# Altium PCB charger.PcbDoc
Units mil, origin at the board's own origin, x right, y up, seen from the top; angles counter-clockwise.
Board outline 1720 x 2280 mil, 2 copper layers (Top Layer, Bottom Layer); 11 components, 7 nets, 27 pads, 5 vias.
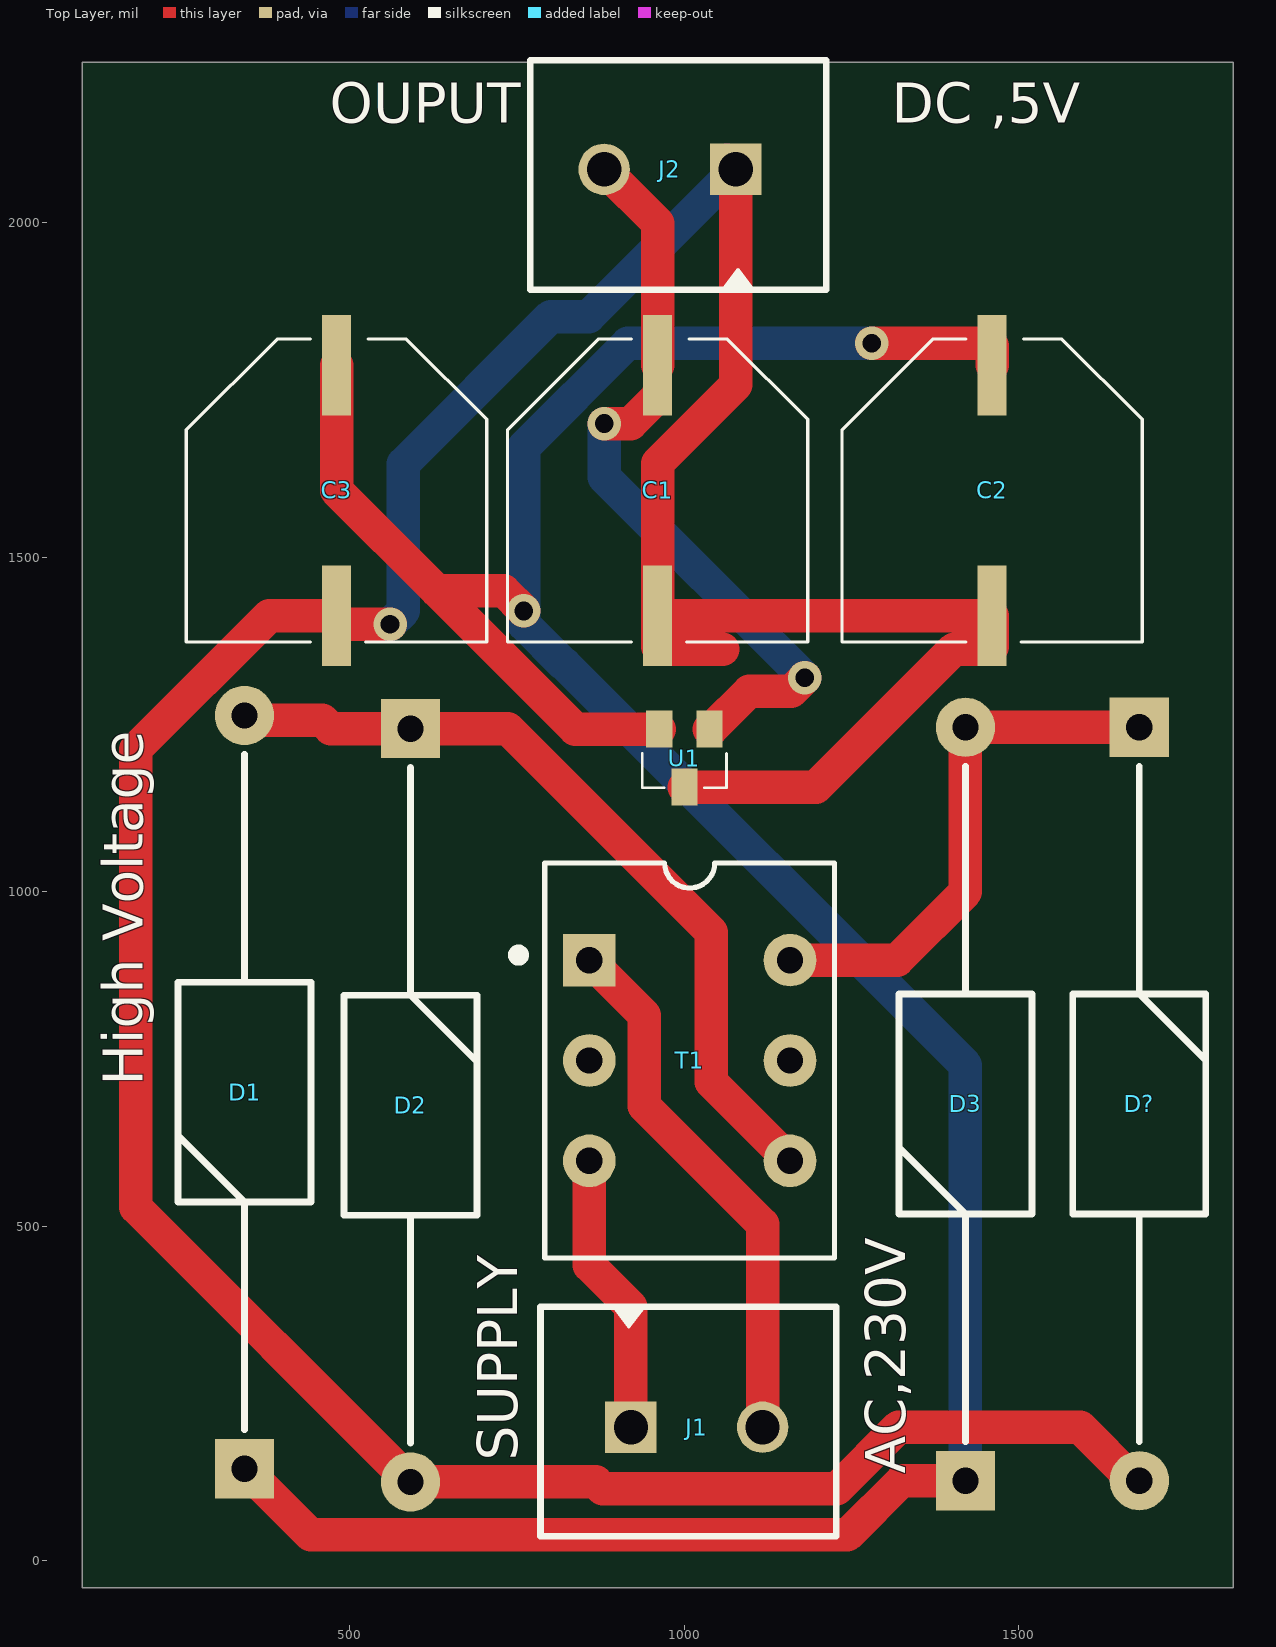
[diagram p0: Top Layer view]
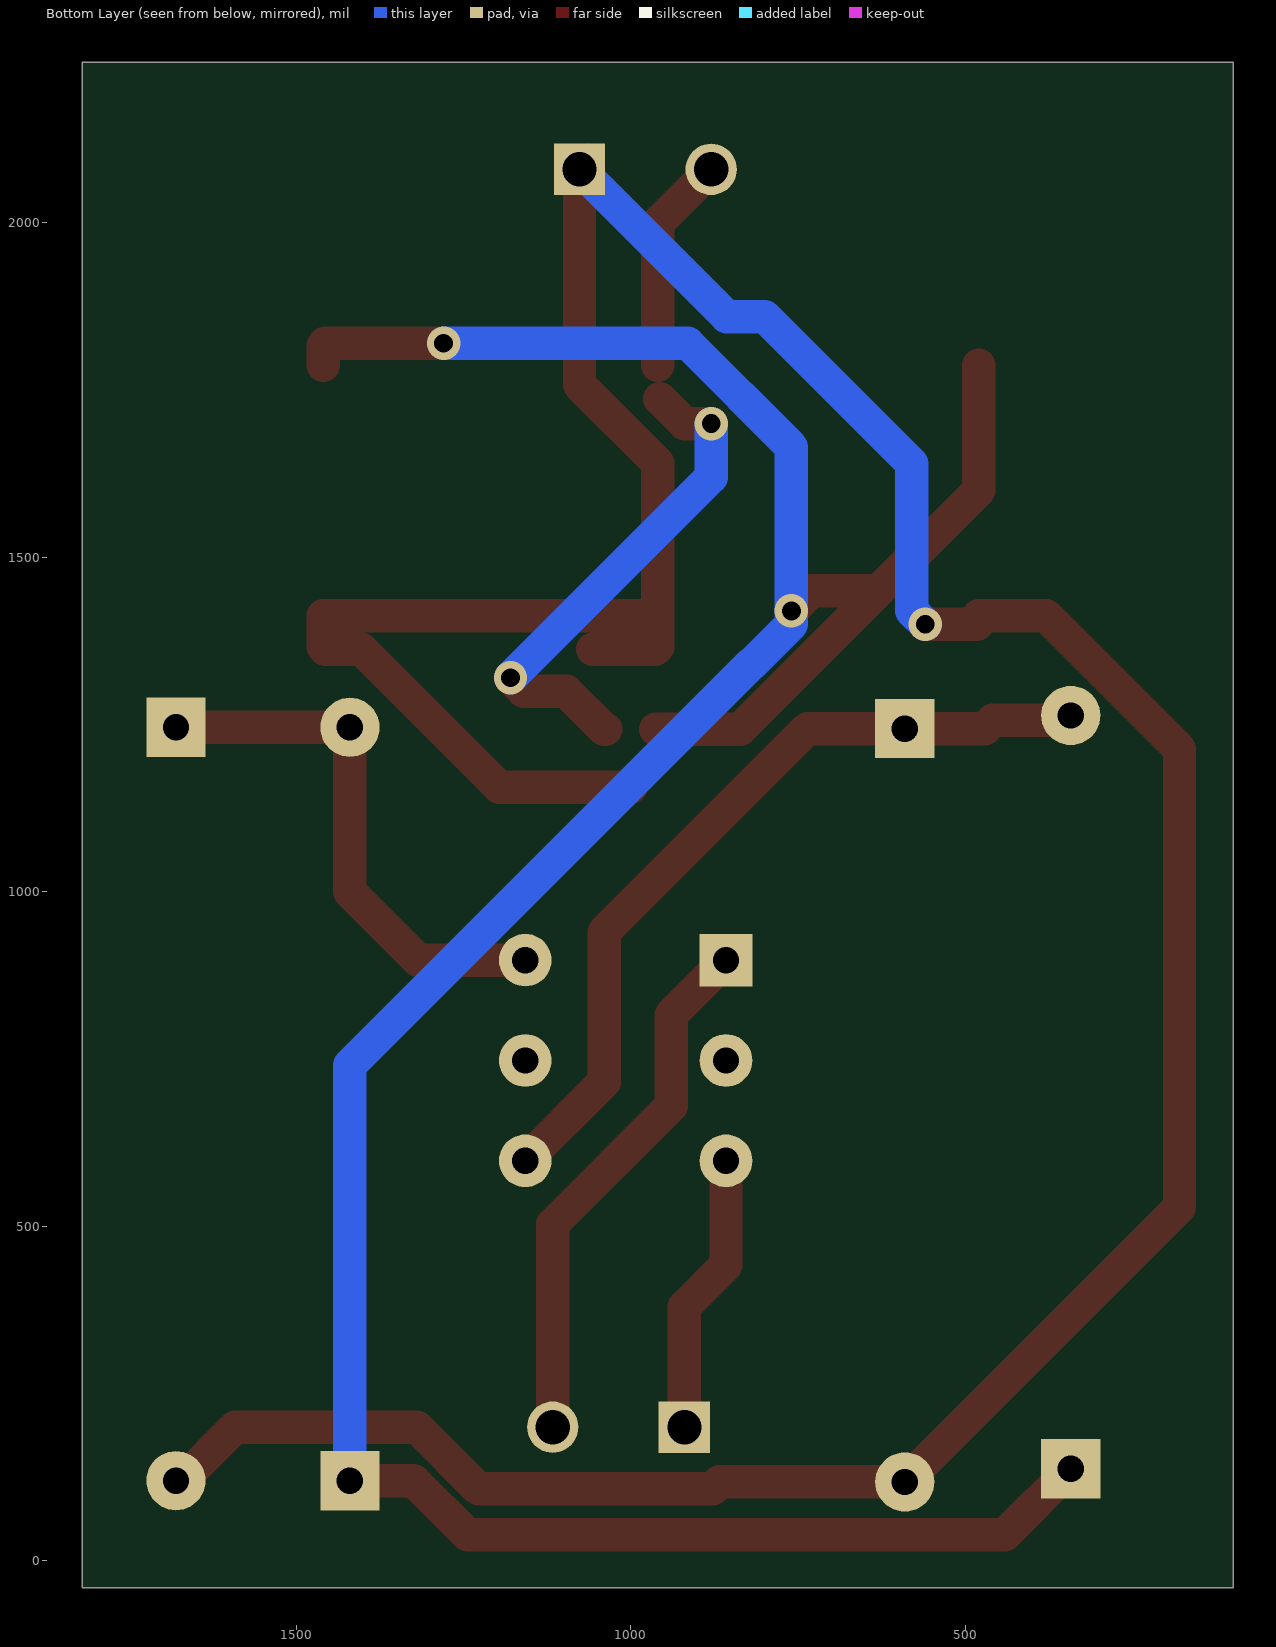
[diagram p1: Bottom Layer view, seen from below]
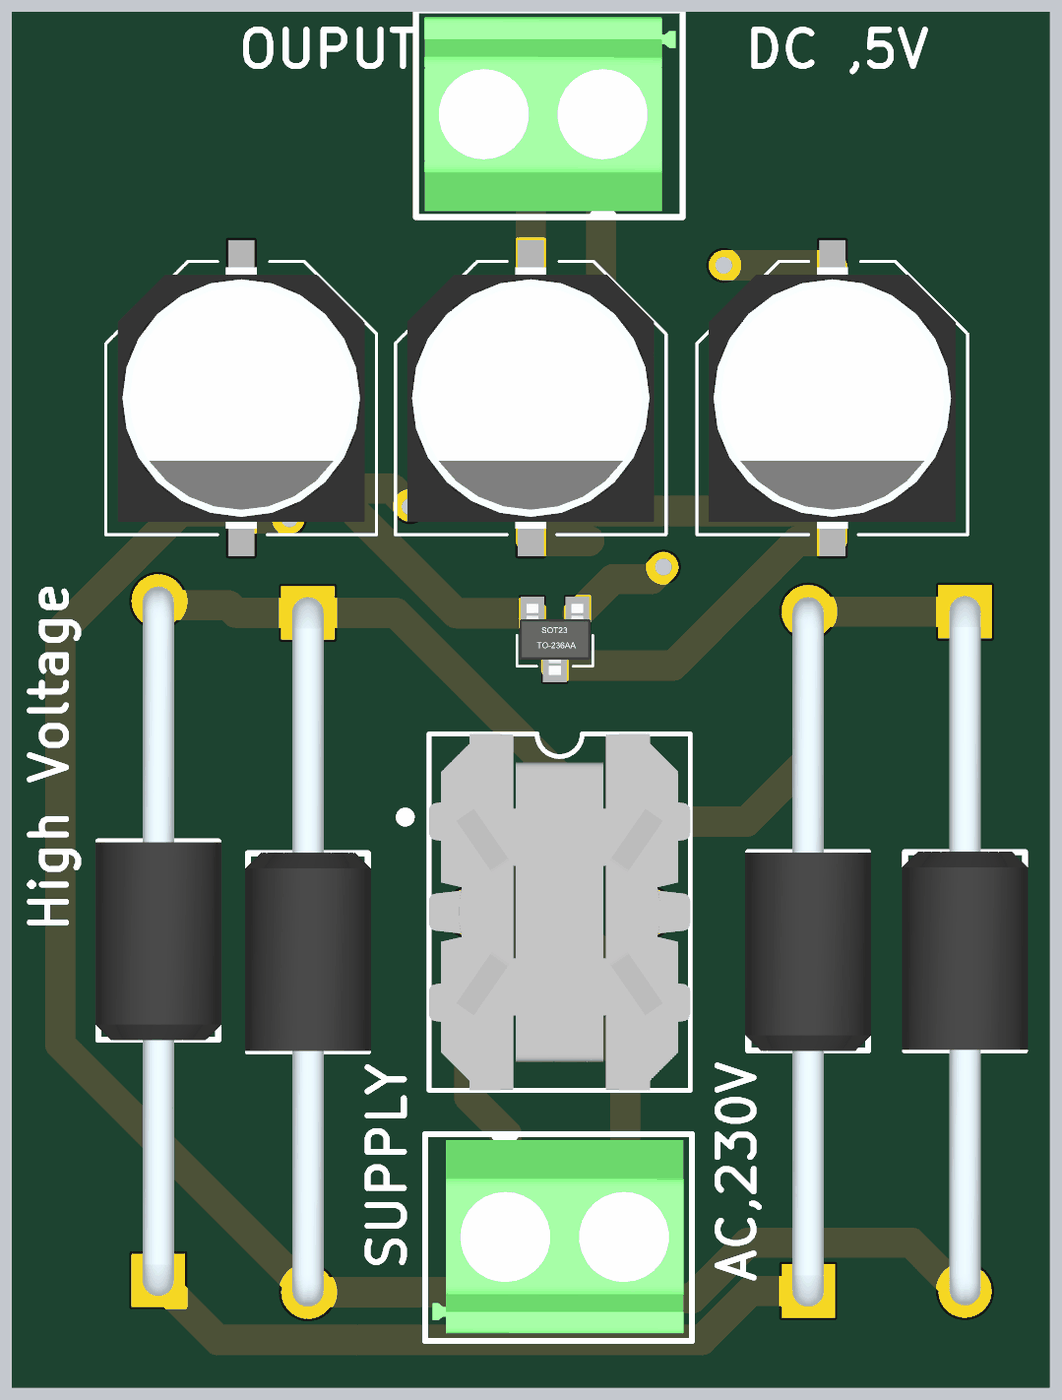
[diagram p2: 3D render of the assembled board from above, using the file's embedded part models]

## Layer stack, top to bottom
Top Solder: solder mask 0.4, Solder Resist, Dk 3.5
Top Layer: signal copper 1.4
Dielectric 1: dielectric 12.6, FR-4, Dk 4.8
Bottom Layer: signal copper 1.4
Bottom Solder: solder mask 0.4, Solder Resist, Dk 3.5

## Board outline
100,-40 1820,-40 1820,2240 100,2240

## Design rules (kind name [scope] priority, off if disabled: settings)
Clearance [All] p1: gap=10 ignorepadtopadclearanceinfootprint=FALSE except(0: Arc-Hole Track-Hole SMDPad-Hole THPad-Hole Via-Hole Fill-Hole Poly-Hole Region-Hole Text-Hole)
PolygonConnect [All] p1: connectstyle=Relief reliefconductorwidth=10 reliefentries=4 polygonreliefangle="90 Angle" airgapwidth=10
RoutingVias [All] p1: holewidth=28 width=50 viastyle="Through Hole" minholewidth=28 minwidth=50 maxholewidth=28 maxwidth=50
SolderMaskExpansion [All] p1: expansion=4 istentingtop=FALSE
Width [All] p1: maxlimit=50 minlimit=30 preferedwidth=50
30 further rules are at their usual default settings.

## Components (designator, comment, footprint, x,y, rotation, side; value= is the part's Value field where it differs from the comment)
C1 ".01uF" ACAP_P305_D393_H393_RAD 960,1600 r270 top
C2 "470uF" ACAP_P305_D393_H393_RAD 1460,1600 r270 top
C3 ".01uF" ACAP_P305_D393_H393_RAD 480,1600 r270 top
D1 "1N4005-TP" DIO_DO-201AD_TH 342.52,137.8 r90 top
D2 "1N4005-TP" DIO_DO-201AD_TH 590.55,1244.09 r270 top
D3 "1N4005-TP" DIO_DO-201AD_TH 1420,120 r90 top
D? "1N4005-TP" DIO_DO-201AD_TH 1680,1245.98 r270 top
J1 "TERMINAL BLOCK 2 PIN" CON2_P196_1729128_TH_ST 920,200 r0 top
J2 "TERMINAL BLOCK 2 PIN" CON2_P196_1729128_TH_ST 1076.85,2080 r180 top
T1 "7491181012" EE13_7_4-Vertical_(EF12.6) 1007.87,748.03 r0 top
U1 "LM3480" "SOT 23-3" 1000,1200 r90 top

## Footprints (in the part's own frame and the unit in brackets; to place one, negate y for a bottom-side part, rotate by r counter-clockwise, add the part's x,y. Pads: shape width x height; smd on the part's side, far side on the other; paste and mask are expansions set on the pad)
ACAP_P305_D393_H393_RAD [mm] "Aluminium Capacitor"
  rect 3.81x1.1 smd: 1(-4.75,0) 2(4.75,0)
  silkscreen extent -5.75,-5.7 5.75,5.7, body extent -5.5,-5.2 5.5,5.2, height 10.41
CON2_P196_1729128_TH_ST [mm] "Terminal Block"
  rect 1.95x1.95 / inner round 1.95 / far side rect 1.95x1.95 hole 1.3: 1(0,0)
  round 1.95 hole 1.3: 2(5,0)
  silkscreen extent -3.43,-4.14 7.8,4.57, body extent -3.13,-3.83 7.44,4.32, height 10.51
DIO_DO-201AD_TH [mm] "DIODE"
  round 2.25 hole 1: A(28.6,0)
  rect 2.25x2.25 / inner round 2.25 / far side rect 2.25x2.25 hole 1: K(0,0)
  silkscreen extent 1.48,-2.52 27.13,2.52, body extent -0.65,-2.65 29.21,2.65, height 5.3
EE13_7_4-Vertical_(EF12.6) [mm] "THT, 6-Leads, Body 15 x11mm (max), Pitch 3.81mm"
  rect 2x2 hole 1: 1(-3.81,3.81)
  round 2 hole 1: 2(-3.81,0) 3(-3.81,-3.81) 4(3.81,-3.81) 5(3.81,0) 6(3.81,3.81)
  silkscreen extent -6.7,-7.5 5.5,7.5, body extent -5.5,-7.5 5.5,7.5, height 16.8
"SOT 23-3" [mm] "Case: SOT23"
  rect 1.4x1 smd paste+0 mask+0.076: 1(1.1,-0.95) 2(1.1,0.95) 3(-1.1,0)
  silkscreen extent -1.12,-1.6 0.18,1.6, body extent -1.5,-1.5 1.5,1.5, height 1.3

## Part data
C1 C2 C3: library part CAP-P_100uF-50V-20%-RAD, "100µF 50V Aluminum Polymer Capacitor Radial, Can - SMD 28mOhm 4000 Hrs @ 125°C", Alternate Part Number-1=VEU101M1HTR-1010, Case/Package=Radial-SMD, Manufacturer=Nichicon, Manufacturer Part Number=GYA1H101MCQ1GS, Supplier Part Number-1=GYA1H101MCQ1GS, Supplier-1="SP ROAD"
D1 D2 D3 D?: library part DIO_600V-1A-DO-41, "Diode Standard 600V 1A Through Hole DO-41", Alternate Part Number-1=NA, Case/Package=DO-41, Manufacturer="Vishay Semiconductors", Supplier Part Number-1=1N4007, Manufacturer Part Number=1N4005-TP, Supplier-1=SIRICOM
J1 J2: library part CON-TB_2X1-196-ST-TH, "2 Pins, 1 Row 5mm Pitch, straight Connector, male", Alternate Part Number-1=NA, Case/Package=TH-CON, Manufacturer="Phoenix Contact", Manufacturer Part Number=MKDSN1,5/2, Supplier Part Number-1=MKDSN1,5/2, Supplier-1="SP ROAD"
T1: library part CMP-1476-00004-1, "Off-Line Transformer WE-UNIT , L=2.8mH", Inductance=2.8mH, Input Voltage (AC)=85-265, Manufacturer="Wuerth Elektronik", Output Current (A)=0.25, Output Voltage (DC)=12, ComponentLink1Description="Manufacturer URL", ComponentLink1URL=http://www.we-online.com, ComponentLink2Description=Datasheet, ComponentLink2URL=http://www.we-online.de/katalog/media/pdf/7491181012.pdf, PackageReference=EE13_7_4-Vertical_(EF12.6), PartNumber=7491181012, Turns Ratio="\"8.1\",\"1\""
U1: library part REG_30V-5V-100mA-1.4W-SOT23-3, "Linear Voltage Regulator IC 1 Output 100mA SOT-23-3", Alternate Part Number-1=NA, Case/Package=SOT23-3, Manufacturer="Texas Instruments", Manufacturer Part Number=LM3480IM3-5.0/NOPB, Supplier Part Number-1=LM3480IM3-5.0/NOPB, Supplier-1="CATLOG COMPONENTS"

## Via types
v1: diameter 50, hole 28, Top Layer to Bottom Layer, 5 vias

## Nets (pads, with @x,y where several pads share a name; then routed paths per layer and width w, separated by ;. In a path a pad name is that pad's centre, name@x,y a point inside that pad or via, vN(x,y) a via of type N, cw(c..) or ccw(c..) an arc to the next point about the centre after c; other vN are vias at no path point)
NetC1_1: C1.1 J2.2 U1.1 | length 1096.7
  Top Layer w50: v1(880,1700) 919.65,1700 C1.1@956.65,1737.01 ; J2.2 880,2079.65 960,1999.65 C1.1 ; U1.1 1040.15,1243.31 1096.84,1300 1160,1300 v1(1180,1320)
  Bottom Layer w50: v1(880,1700) 880,1620 v1(1180,1320)
NetC1_2: C1.2 C2.2 C3.2 D2.A D?.A J2.1 U1.3 | length 5808.1
  Top Layer w50: v1(560,1400) 483.35,1400 480,1403.35 C3.2 379.6,1412.99 180,1213.39 180,528.66 D2.A 867.58,118.11 877.98,107.72 1227.72,107.72 1320,200 1591.3,200 1671.3,120 D?.A ; U1.3@1002.55,1159.25 U1.3 1196.69,1156.69 1402.99,1362.99 1456.65,1362.99 1460,1366.34 C2.2 C1.2 ; 1057.01,1362.99 963.35,1362.99 960,1366.34 C1.2 ; J2.1@1063.46,2093.39 J2.1 1076.85,1757.71 960,1640.86 C1.2
  Bottom Layer w50: v1(560,1400) 580,1420 580,1640 800,1860 856.85,1860 J2.1
NetC2_1: C2.1 C3.1 D1.K D3.K U1.2 | length 4726
  Top Layer w50: D1.K 441.5,38.82 1243.67,38.82 1324.85,120 D3.K ; C3.1 480,1600 630,1450 ; v1(760,1420) 730,1450 630,1450 ; U1.2 836.69,1243.31 630,1450 ; v1(1280,1820) 1456.65,1820 1460,1816.65 C2.1
  Bottom Layer w50: v1(1280,1820) 915.15,1820 760,1664.85 v1(760,1420) 760,1400 820,1340 821.08,1340 1420,741.08 D3.K
NetD1_A: D1.A D2.K T1.4 | length 1222.4
  Top Layer w50: D1.A 349.9,1256.4 458.96,1256.4 471.26,1244.09 D2.K 735.91,1244.09 1040,940 1040,715.91 T1.4
NetD3_A: D3.A D?.K T1.6 | length 810.3
  Top Layer w50: T1.6 1318.03,898.03 1420,1000 D3.A D?.K
NetJ1_1: J1.1 T1.3 | length 423.8
  Top Layer w50: T1.3 857.87,442.13 920,380 J1.1
NetJ1_2: J1.2 T1.1 | length 805.3
  Top Layer w50: T1.1 940,815.91 940,680 1116.85,503.15 J1.2
pads on no net: T1.2 T1.5

## Silkscreen, mask and mechanical layers (free items; w line width, h text height)
Top Overlay:
  text "OUPUT" at 470,2150 h60
  text "DC ,5V" at 1310,2149.99 h60
  text "High Voltage" at 190.01,710 h60 r90
  text "SUPPLY" at 750,150 h60 r90
  text "AC,230V" at 1330.01,130 h60 r90